# Altium PCB RD15002SCT拼板20160225.PcbDoc (part 2 of 2)
Units mil, origin at the board's own origin, x right, y up, seen from the top; angles counter-clockwise.
Board outline 2710 x 2010 mil, 2 copper layers (Top Layer, Bottom Layer); 365 components, 184 nets, 1158 pads, 288 vias.
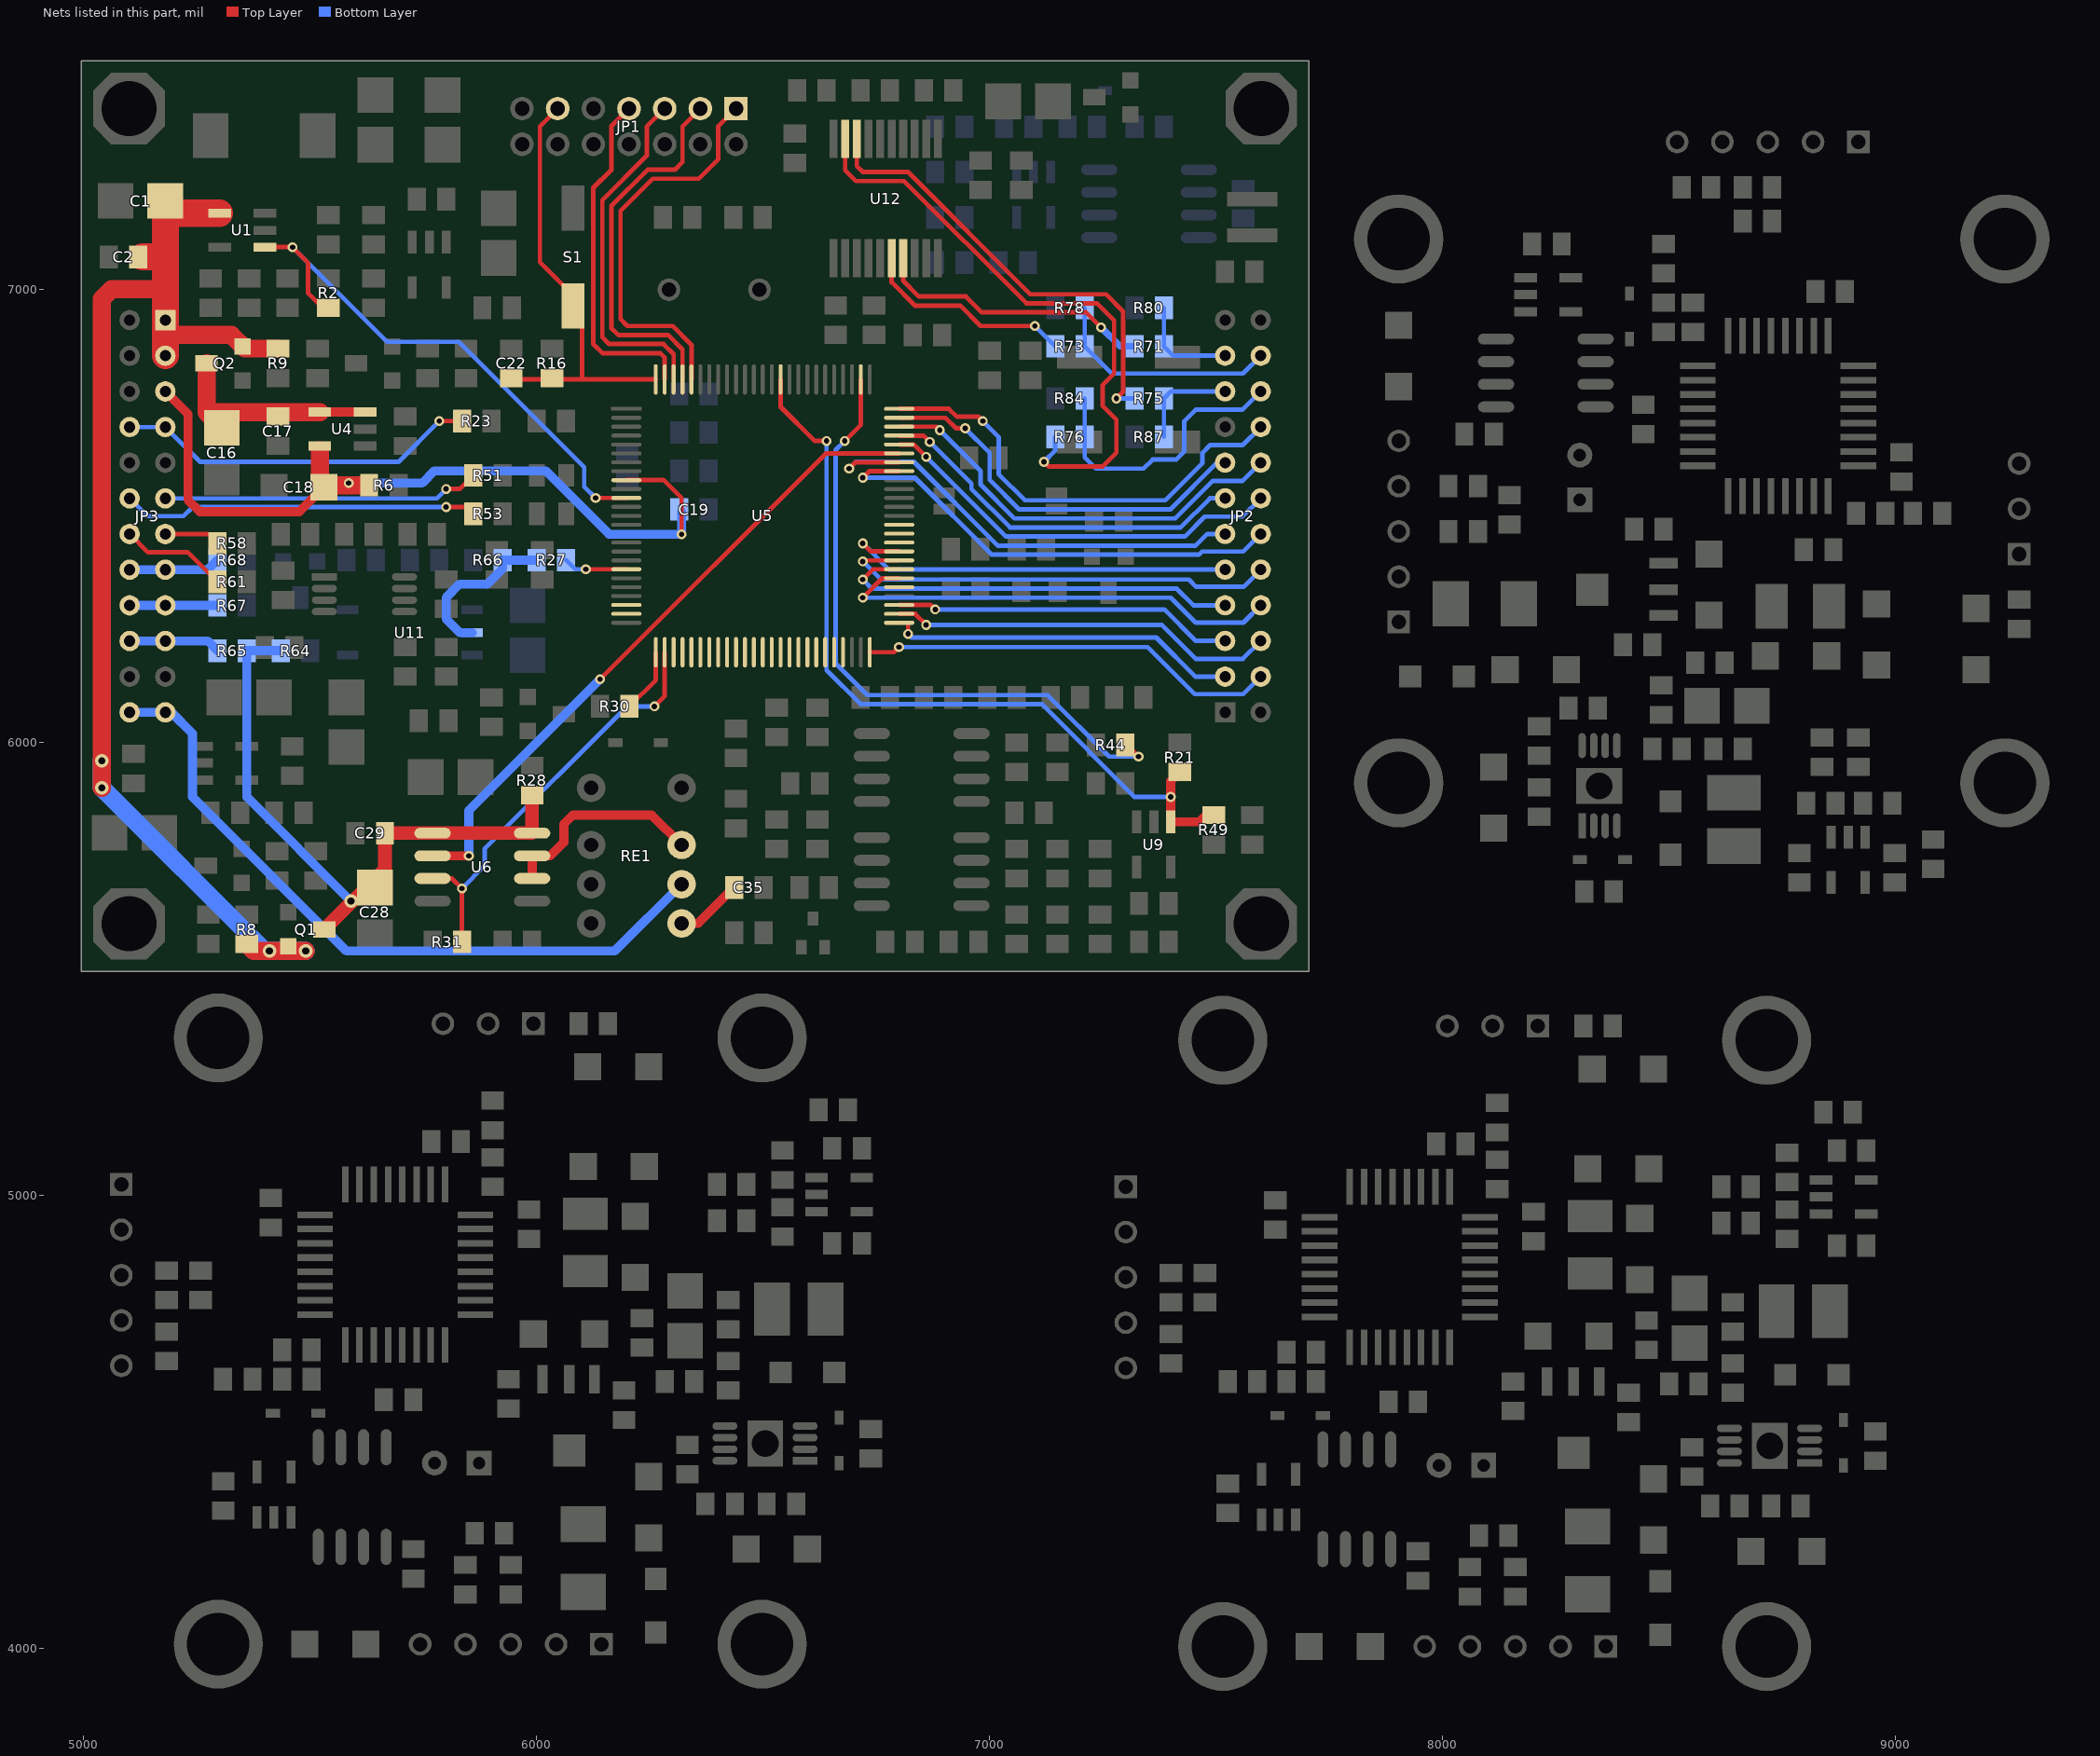
[diagram p2: the nets of this part, all layers, seen from the top]

## Via types
v1: diameter 30, hole 16, Top Layer to Bottom Layer, 220 vias
v2: diameter 22, hole 12, Top Layer to Bottom Layer, 68 vias

## Nets (pads, with @x,y where several pads share a name; then routed paths per layer and width w, separated by ;. In a path a pad name is that pad's centre, name@x,y a point inside that pad or via, vN(x,y) a via of type N, cw(c..) or ccw(c..) an arc to the next point about the centre after c; other vN are vias at no path point) (continued)
P3.0: JP2.18 U5.75 | length 1010.6
  Top Layer w10: U5.75@6800.36,6737 6910,6737 6927,6720 6975,6720 v2(6985,6710)
  Bottom Layer w10: v2(6985,6710) 7020,6675 7020,6593 7078,6535 7388,6535 7470,6617 7470,6640 7487,6657 7558.82,6657 JP2.18@7598.74,6696.92
P3.1: JP2.15 U5.74 | length 881.3
  Top Layer w10: U5.74@6800.36,6717.31 6902.69,6717.31 6926,6694 v2(6946,6694)
  Bottom Layer w10: v2(6946,6694) 7000,6640 7000,6580 7065,6515 7399,6515 7502.18,6618.18 JP2.15@7520,6618.18
P3.2: JP2.16 U5.73 | length 950.9
  Top Layer w10: U5.73@6800.36,6697.63 6882.37,6697.63 v2(6890,6690)
  Bottom Layer w10: v2(6890,6690) 6980,6600 6980,6570 7055,6495 7410,6495 7493,6578 7558.56,6578 JP2.16@7598.74,6618.18
P3.3: JP2.13 U5.72 | length 837.4
  Top Layer w10: U5.72@6800.36,6677.94 6854.06,6677.94 v2(6868,6664)
  Bottom Layer w10: v2(6868,6664) 6960,6572 6960,6560 7045,6475 7422,6475 7486.44,6539.44 JP2.13@7520,6539.44
P3.4: JP2.14 U5.71 | length 917.5
  Top Layer w10: U5.71@6800.36,6658.26 6832.74,6658.26 v2(6860,6631)
  Bottom Layer w10: v2(6860,6631) 7036,6455 7431,6455 7475,6499 7558.3,6499 JP2.14@7598.74,6539.44
P3.6: JP2.11 U5.69 | length 1039.6
  Top Layer w10: v2(6690,6605) 6703.89,6618.89 U5.69@6800.36,6618.89
  Bottom Layer w10: v2(6690,6605) 6705,6620 6833,6620 7018,6435 7455,6435 7480.7,6460.7 JP2.11@7520,6460.7
P3.7: JP2.12 U5.68 | length 1054.3
  Top Layer w10: v2(6720,6585) 6734.2,6599.2 U5.68@6800.36,6599.2
  Bottom Layer w10: v2(6720,6585) 6835,6585 7005,6415 7462,6415 7469,6422 7560.04,6422 JP2.12@7598.74,6460.7
P4.1: JP2.5 U5.53 | length 752.5
  Top Layer w10: U5.53@6800.36,6303.93 6870.07,6303.93 v2(6880,6294)
  Bottom Layer w10: v2(6880,6294) 7386,6294 7455.52,6224.48 JP2.5@7520,6224.48
P4.2: JP2.6 U5.52 | length 855.8
  Top Layer w10: U5.52@6800.36,6284.24 6835.76,6284.24 v2(6860,6260)
  Bottom Layer w10: v2(6860,6260) 7380,6260 7455,6185 7559.26,6185 JP2.6@7598.74,6224.48
P4.3: JP2.3 U5.51 | length 763
  Top Layer w10: v2(6820,6240) U5.51@6820,6264
  Bottom Layer w10: v2(6820,6240) 6828,6232 7368,6232 7454.26,6145.74 JP2.3@7520,6145.74
P4.7: U5.47
P5.0: U5.55
P5.1: JP2.8 U5.56 | length 1015.5
  Top Layer w10: v2(6720,6320) 6762.98,6362.98 U5.56@6800.36,6362.98
  Bottom Layer w10: v2(6720,6320) 7400,6320 7455,6265 7560.52,6265 JP2.8@7598.74,6303.22
P5.2: JP2.7 U5.57 | length 913.3
  Top Layer w10: v2(6720,6360) 6742.67,6382.67 U5.57@6800.36,6382.67
  Bottom Layer w10: v2(6720,6360) 6740,6340 7413,6340 7449.78,6303.22 JP2.7@7520,6303.22
P5.3: JP2.10 U5.58 | length 999
  Top Layer w10: v2(6720,6400) 6722.35,6402.35 U5.58@6800.36,6402.35
  Bottom Layer w10: v2(6720,6400) 6760,6360 7440,6360 7456,6344 7560.78,6344 JP2.10@7598.74,6381.96
P5.4: JP2.9 U5.59 | length 911.8
  Top Layer w10: v2(6720,6440) 6737.96,6422.04 U5.59@6800.36,6422.04
  Bottom Layer w10: v2(6720,6440) 6778.04,6381.96 JP2.9@7520,6381.96
P5.5: U5.60
P5.6: U5.61
P5.7: U5.62
P7.0: U5.46
P7.1: U5.45
P7.2: U5.44
P7.3: U5.43
P7.4: U5.42
P7.5: U5.41
P7.6: U5.40
P7.7: U5.39
P8.0: U5.38
P8.1: U5.37
P8.2: U5.36
P8.3: U5.35
P8.4: U5.34
P8.5: U5.33
P8.6: U5.32
P8.7: U5.31
P9.0: U5.30
P9.1: U5.29
P9.2: U5.28
P9.6: U5.24
P9.7: U5.23
P10.3: R27.1 U5.19 | length 141.4
  Top Layer w10: v2(6108.33,6382.67) U5.19@6198,6382.67
  Bottom Layer w10: R27.1@6065,6403 6085.33,6382.67 v2(6108.33,6382.67)
PCRX/B-: JP2.22 R73.2 R78.2 | length 514.9
  Bottom Layer w10: R78.2@7210,6960 R73.2@7210,6875 7270,6815 7559.34,6815 JP2.22@7598.74,6854.4
PCTX/A+: JP2.21 R71.2 R80.2 | length 228.5
  Bottom Layer w10: R80.2@7385,6960 R71.2@7385,6875 7405.6,6854.4 JP2.21@7520,6854.4
PULSE: R27.2 R66.2 U11.5 | length 362.7
  Bottom Layer w20: U11.5@5857.8,6243 5830,6243 5800,6273 5800,6320 5830,6350 5891,6350 5925,6384 R66.2@5925,6403 R27.2@6000,6403
PULSE2: JP3.15 JP3.16 R68.1 | length 202.5
  Bottom Layer w20: JP3.16@5101.26,6381.82 5273.82,6381.82 R68.1@5295,6403
PWR_CN: R2.1@5540,6960 U1.1@5400,7094 U5.11 | length 1226.4
  Top Layer w10: U1.1@5400,7094 v2(5461,7094) 5495,7060 5495,6993 5528,6960 R2.1@5540,6960 ; v2@6130,6540 v2(6130.15,6540.15) U5.11@6198,6540.15
  Bottom Layer w10: v2(5461,7094) 5670,6885 5828,6885 6105,6608 6105,6565.3 v2(6130.15,6540.15)
RAIN1: JP3.19 JP3.20 R65.2 | length 202.6
  Bottom Layer w20: JP3.20@5101.26,6224.34 5273.66,6224.34 R65.2@5295,6203
RAIN2/PULSE1: JP3.17 JP3.18 R67.1 | length 193.9
  Bottom Layer w10: R67.1@5294.92,6303.08 R67.1@5295,6303
  Bottom Layer w20: JP3.18@5101.26,6303.08 5101.34,6303 R67.1@5295,6303
RED: JP3.23 JP3.24 RE1.6 | length 1580
  Bottom Layer w20: JP3.24@5101.26,6066.86 5193.14,6066.86 5240,6020 5240,5880 5580,5540 6172.6,5540 RE1.6@6320,5687.4
RED_R: C35.2 RE1.5 | length 148.8
  Top Layer w20: RE1.5@6320,5600.79 6356.79,5600.79 C35.2@6436,5680
RED_T: RE1.7 U6.6 U6.7 | length 468
  Top Layer w20: U6.6@5990,5700 U6.7@5990,5750 6030,5750 6060,5780 6060,5820 6080,5840 6254.02,5840 RE1.7@6320,5774.02
RES_SENSOR+: JP3.11 R51.2 | length 701
  Top Layer w10: v2(5800,6560) 5830,6560 R51.2@5860,6590
  Bottom Layer w10: JP3.11@5180,6539.3 5779.3,6539.3 v2(5800,6560)
RES_SENSOR-: JP3.12 R53.2 | length 789.5
  Top Layer w10: v2(5800,6520) 5845,6520 R53.2@5860,6505
  Bottom Layer w10: JP3.12@5101.26,6539.3 5140.56,6500 5220,6500 5240,6520 v2(5800,6520)
RESET: C22.2@5943.98,6805 JP1.11 R16.1@6034,6805 S1.2 U5.100 | length 973.1
  Top Layer w10: C22.2@5943.98,6805 5947.02,6801.96 U5.100@6262.96,6801.96 ; JP1.11@6046.3,7400 6007,7360.7 6007,7061 6080,6988 6080,6939 6100,6919 6100,6801.96
RS232RX0: R73.1 U12.16 | length 472.8
  Top Layer w10: U12.16@6783.64,7069.29 6783.64,7016.36 6835,6965 6935,6965 6980,6920 v2(7100,6920)
  Bottom Layer w10: v2(7100,6920) R73.1@7145,6875
RS232RX1: R76.1 U12.9 | length 1357.2
  Top Layer w10: U12.9@6681.28,7333.07 6681.28,7263.72 6705,7240 6811,7240 7081,6970 7237,6970 7275,6932 7275,6815 7250,6790 7250,6743 7280,6713 7280,6640 7250,6610 7130,6610 v2(7120,6620)
  Bottom Layer w10: v2(7120,6620) 7145,6645 R76.1@7145,6675
RS232TX0: R71.1 U12.17 | length 620.3
  Top Layer w10: U12.17@6809.23,7069.29 6809.23,7019.77 6844,6985 6948,6985 6983,6950 7213,6950 v2(7246,6917)
  Bottom Layer w15: v2(7246,6917) 7288,6875 R71.1@7320,6875
RS232TX1: R75.1 U12.8 | length 1019.3
  Top Layer w10: U12.8@6706.87,7333.07 6706.87,7273.13 6720,7260 6820,7260 7090,6990 7257,6990 7295,6952 7295,6775 v2(7280,6760)
  Bottom Layer w10: v2(7280,6760) R75.1@7320,6760
SENSORRX/B-: JP2.20 R76.2 R84.2 | length 639
  Bottom Layer w10: R84.2@7210,6760 7210,6630 7235,6605 7340,6605 7360,6625 7412,6625 7430,6643 7430,6710 7455,6735 7558.08,6735 JP2.20@7598.74,6775.66
SENSORTX/A+: JP2.19 R75.2 R87.2 | length 226.5
  Bottom Layer w10: R87.2@7385,6675 R75.2@7385,6760 7400.66,6775.66 JP2.19@7520,6775.66
TCK: JP1.7 U5.99 | length 771
  Top Layer w10: JP1.7@6203.78,7400 6165,7361.22 6165,7265 6125,7225 6125,6880 6145,6860 6273,6860 6282.65,6850.35 U5.99@6282.65,6801.96
TDI: JP1.3 U5.97 | length 844
  Top Layer w10: U5.97@6322.02,6801.96 6322.02,6867.98 6290,6900 6180,6900 6165,6915 6165,7185 6245,7265 6305,7265 6322,7282 6322,7360.74 JP1.3@6361.26,7400
TDO: JP1.1 U5.96 | length 886.9
  Top Layer w10: U5.96@6341.7,6801.96 6341.7,6878.3 6300,6920 6200,6920 6185,6935 6185,7174 6256,7245 6358,7245 6401,7288 6401,7361 JP1.1@6440,7400
TMS: JP1.5 U5.98 | length 790.5
  Top Layer w10: JP1.5@6282.52,7400 6243,7360.48 6243,7296 6145,7198 6145,6895 6160,6880 6280,6880 6302.33,6857.67 U5.98@6302.33,6801.96
TRAN_PWR_CN: JP2.4 U5.50 | length 927.2
  Top Layer w10: U5.50@6735.4,6199.6 6788.6,6199.6 v2(6800,6211)
  Bottom Layer w10: v2(6800,6211) 7349,6211 7453,6107 7560,6107 JP2.4@7598.74,6145.74
VBAT: C1.1@5180,7196 C2.2@5120,7071.94 JP3.1 JP3.3 Q1.2 Q2.2 R8.1@5359.99,5555.02 R9.1@5428.99,6870 U1.4@5300,7169 | length 2797.2
  Top Layer w40: v1(5040,5900) 5040,6980 5061,7001 5180,7001 ; 5180,6900 5326,6900 5356,6870 R9.1@5428.99,6870 ; R8.1@5359.99,5555.02 5375.01,5540 v1(5490,5540)
  Top Layer w60: C2.2@5130,7073 5180,7073 ; JP3.3@5180,6854.26 C1.1@5180,7196 ; C1.1@5180,7169 U1.4@5300,7169
  Bottom Layer w40: v1(5040,5960) v1(5040,5900) 5400,5540 v1(5490,5540)
  other v1: 5410,5540
VCOLL: C28.1 C29.2 Q1.3 R28.1 R64.1 R65.1 U6.1@5770,5800 U6.8 | length 1400.8
  Top Layer w30: Q1.3@5531,5587.01 5665,5721.01 C29.2@5665,5800 U6.8@5990,5800 R28.1@5990,5884
  Bottom Layer w20: R64.1@5435,6203 R65.1@5360,6203 5360,5880 v1(5590,5650)
VCORE: C16.1@5305,6695 C17.2@5429.06,6720 Q2.3 U4.3@5621,6730 U4.4@5521,6730 | length 507.1
  Top Layer w20: U4.4@5521,6730 U4.3@5621,6730
  Top Layer w40: C16.1@5271,6730 U4.4@5521,6730 ; Q2.3@5271,6837.99 5271,6729 C16.1@5305,6695
VOL_CUR+: JP3.13 R58.2 | length 123.5
  Top Layer w10: JP3.13@5180,6460.56 5274.44,6460.56 R58.2@5295,6440
VOL_CUR-: JP3.14 R61.2 | length 238.5
  Top Layer w10: JP3.14@5101.26,6460.56 5141.82,6420 5230,6420 R61.2@5295,6355 R61.2@5294,6355
VREF: C18.1@5530,6564 C19.2@6315,6515 JP3.5 R6.1@5630,6568.37 U4.5@5521,6655 U5.9 | length 1846.5
  Top Layer w10: U5.9@6198,6579.52 6280.48,6579.52 6320,6540 v2(6320,6460)
  Top Layer w20: JP3.5@5180,6775.52 5230,6725.52 5230,6536 5256,6510 5476,6510 C18.1@5530,6564
  Top Layer w40: U4.5@5521,6645 5521,6577 5529.63,6568.37 R6.1@5630,6568.37
  Bottom Layer w20: v2(5585,6573) 5747,6573 5774,6600 6020,6600 6160,6460 v2(6320,6460) C19.2@6320,6510
VW_DRIVE: U5.70 U6.2@5770,5750 | length 1457
  Top Layer w10: v2(6140,6140) 6638.57,6638.57 U5.70@6800.36,6638.57
  Top Layer w20: U6.2@5770,5750 v2(5850,5750)
  Bottom Layer w20: v2(5850,5750) 5850,5850 v2(6140,6140)
VW_EN: R31.1 U5.27 U6.3@5770,5700 | length 934.3
  Top Layer w10: U6.3@5770,5700 5813,5700 v2(5835,5678) R31.1@5835,5560 ; v2(6260,6080) 6282.65,6102.65 U5.27@6282.65,6199.6
  Bottom Layer w10: v2(5835,5678) 5885,5728 5885,5765 6200,6080 v2(6260,6080)
VW_RA: R44.2 U5.77 | length 1444.1
  Top Layer w10: v2(6680,6666) 6715.72,6701.72 U5.77@6715.72,6801.96 ; R44.2@7300,5995 7303,5995 v2(7329,5969)
  Bottom Layer w10: v2(6680,6666) 6660,6646 6660,6175 6730,6105 7128,6105 7264,5969 v2(7329,5969)
VW_RD: R21.1 R49.2 U5.86 U9.1 | length 1794.7
  Top Layer w10: U5.86@6538.55,6801.96 6538.55,6741.45 6614,6666 v2(6640,6666)
  Top Layer w20: R21.1@7420,5935 7400,5915 U9.1@7400,5825 7463,5825 7478,5840 R49.2@7495,5840
  Bottom Layer w10: v2(6640,6666) 6640,6160 6715,6085 7115,6085 7320,5880 v2(7400,5880)
VW_TRCN: R30.1 U5.26 | length 143.6
  Top Layer w10: R30.1@6205,6080 6262.96,6137.96 U5.26@6262.96,6199.6
WHITE: JP3.7 JP3.8 R23.2 | length 802.8
  Top Layer w10: v2(5785,6710) R23.2@5835,6710
  Bottom Layer w10: JP3.8@5101.26,6696.78 JP3.7@5180,6696.78 5256.78,6620 5695,6620 v2(5785,6710)
pads on no net: C1.1@5487.73,4009.24 C1.1@7705.73,4004.24 C1.1@7903.24,6921.27 C1.2@5622.73,4009.24 C1.2@7840.73,4004.24 C1.2@7903.24,6786.27 C2.1@5872.73,4409.24 C2.1@8090.73,4404.24 C2.1@8303.24,6536.27 C2.2@5774.31,4409.24 C2.2@7992.31,4404.24 C2.2@8303.24,6634.69 C3.1@6462.73,4219.24 C3.1@8113.24,5946.27 C3.1@8680.73,4214.24 C3.2@6597.73,4219.24 C3.2@8113.24,5811.27 C3.2@8815.73,4214.24 C4.1@6507.73,4319.24 C4.1@8213.24,5901.27 C4.1@8725.73,4314.24 C4.2@6572.73,4319.24 C4.2@8213.24,5836.27 C4.2@8790.73,4314.24 C5.1@6332.73,4384.24 C5.1@8278.24,6076.27 C5.1@8550.73,4379.24 C5.2@6332.73,4449.24 C5.2@8343.24,6076.27 C5.2@8550.73,4444.24 C6.1@6737.73,4484.24 C6.1@8378.24,5671.27 C6.1@8955.73,4479.24 C6.2@6737.73,4419.24 C6.2@8313.24,5671.27 C6.2@8955.73,4414.24 C7.1@6422.73,4704.24 C7.1@8598.24,5986.27 C7.1@8640.73,4699.24 C7.2@6422.73,4769.24 C7.2@8640.73,4764.24 C7.2@8663.24,5986.27 C8.1@6327.73,4789.24 C8.1@8545.73,4784.24 C8.1@8683.24,6081.27 C8.2@6327.73,4679.24 C8.2@8545.73,4674.24 C8.2@8573.24,6081.27 C9.1@6192.73,4569.24 C9.1@8410.73,4564.24 C9.1@8463.24,6216.27 C9.2@6192.73,4504.24 C9.2@8398.24,6216.27 C9.2@8410.73,4499.24 C10.1@5937.73,4529.24 C10.1@8155.73,4524.24 C10.1@8423.24,6471.27 C10.2@5937.73,4594.24 C10.2@8155.73,4589.24 C10.2@8488.24,6471.27 C11.1@6127.73,4694.24 C11.1@8345.73,4689.24 C11.1@8588.24,6281.27 C11.2@5992.73,4694.24 C11.2@8210.73,4689.24 C11.2@8588.24,6416.27 C12.1@5412.73,4994.24 C12.1@7630.73,4989.24 C12.1@8888.24,6996.27 C12.2@5412.73,4929.24 C12.2@7630.73,4924.24 C12.2@8823.24,6996.27 C13.1@6237.73,5064.24 C13.1@8455.73,5059.24 C13.1@8958.24,6171.27 C13.2@6102.73,5064.24 C13.2@8320.73,5059.24 C13.2@8958.24,6306.27 C14.1@6717.73,4894.24 C14.1@8788.24,5691.27 C14.1@8935.73,4889.24 C14.2@6652.73,4894.24 C14.2@8788.24,5756.27 C14.2@8870.73,4889.24 C15.1@6542.73,5034.24 C15.1@8760.73,5029.24 C15.1@8928.24,5866.27 C15.2@6542.73,5099.24 C15.2@8760.73,5094.24 C15.2@8993.24,5866.27 C16.1@6652.73,5104.24 C16.1@8870.73,5099.24 C16.1@8998.24,5756.27 C16.2@6717.73,5104.24 C16.2@8935.73,5099.24 C16.2@8998.24,5691.27 C17.1@6422.73,4634.24 C17.1@8528.24,5986.27 C17.1@8640.73,4629.24 C17.2@6422.73,4569.24 C17.2@8463.24,5986.27 C17.2@8640.73,4564.24 C18.1@5727.73,4154.24 C18.1@7945.73,4149.24 C18.1@8048.24,6681.27 C18.2@5727.73,4219.24 C18.2@7945.73,4214.24 C18.2@8113.24,6681.27 C19.1@5307.73,4304.24 C19.1@7525.73,4299.24 C19.1@8198.24,7101.27 C19.2@5307.73,4369.24 C19.2@7525.73,4364.24 C19.2@8263.24,7101.27 C20.1@5307.73,4594.24 C20.1@7525.73,4589.24 C20.1@8488.24,7101.27 C20.2@5372.73,4594.24 C20.2@7590.73,4589.24 C20.2@8488.24,7036.27 C21.1@6247.73,5284.24 C21.1@8465.73,5279.24 C21.1@9178.24,6161.27 C21.2@6112.73,5284.24 C21.2@8330.73,5279.24 C21.2@9178.24,6296.27 C22.1@6157.73,5379.24 C22.1@8375.73,5374.24 C22.1@9273.24,6251.27 C22.2@6092.73,5379.24 C22.2@8310.73,5374.24 C22.2@9273.24,6316.27 C23.1@5767.73,5119.24 C23.1@7985.73,5114.24 C23.1@9013.24,6641.27 C23.2@5832.73,5119.24 C23.2@8050.73,5114.24 C23.2@9013.24,6576.27 C24.1@5182.73,4834.24 C24.1@7400.73,4829.24 C24.1@8728.24,7226.27 C24.2@5182.73,4769.24 C24.2@7400.73,4764.24 C24.2@8663.24,7226.27 C25.1@5982.73,4904.24 C25.1@8200.73,4899.24 C25.1@8798.24,6426.27 C25.2@5982.73,4969.24 C25.2@8200.73,4964.24 C25.2@8863.24,6426.27 D1.1@6262.73,4035.18 D1.1@7929.18,6146.27 D1.1@8480.73,4030.18 D1.2@6262.73,4153.29 D1.2@8047.29,6146.27 D1.2@8480.73,4148.29 D2.1@6102.73,4124.24 D2.1@8018.24,6306.27 D2.1@8320.73,4119.24 D2.2@6102.73,4274.24 D2.2@8168.24,6306.27 D2.2@8320.73,4269.24 D4.1@6667.73,4509.24 D4.1@8403.24,5741.27 D4.1@8885.73,4504.24 D4.2@6667.73,4409.24 D4.2@8303.24,5741.27 D4.2@8885.73,4404.24 D5.1@5417.73,4519.24 D5.1@7635.73,4514.24 D5.1@8413.24,6991.27 D5.2@5517.73,4519.24 D5.2@7735.73,4514.24 D5.2@8413.24,6891.27 D6.1 D6.2 F1.1 F1.2 J1.1 J1.2 J1.3 J1.4 J1.5 JP1.4 JP1.6 JP1.8 JP1.10 JP1.12 JP1.13 JP1.14 L1.1@6637.73,4749.24 L1.1@8643.24,5771.27 L1.1@8855.73,4744.24 L1.2@6519.62,4749.24 L1.2@8643.24,5889.38 L1.2@8737.62,4744.24 P1.1 P1.2 P1.3 P1.4 P1.5 P2.1 P2.2 P2.3 R1.1@6232.73,4729.24 R1.1@8450.73,4724.24 R1.1@8623.24,6176.27 R1.2@6232.73,4664.24 R1.2@8450.73,4659.24 R1.2@8558.24,6176.27 R2.1@6437.73,4319.24 R2.1@8213.24,5971.27 R2.1@8655.73,4314.24 R2.2@6372.73,4319.24 R2.2@8213.24,6036.27 R2.2@8590.73,4314.24 R3.1@6347.73,4589.24 R3.1@8483.24,6061.27 R3.1@8565.73,4584.24 R3.2@6282.73,4589.24 R3.2@8483.24,6126.27 R3.2@8500.73,4584.24 R4.1@6107.73,4959.24 R4.1@8325.73,4954.24 R4.1@8853.24,6301.27 R4.2@6107.73,4833.25 R4.2@8325.73,4828.25 R4.2@8727.25,6301.27 R5.1@6217.73,4954.24 R5.1@8435.73,4949.24 R5.1@8848.24,6191.27 R5.2@6217.73,4819.24 R5.2@8435.73,4814.24 R5.2@8713.24,6191.27 R6.1@6542.73,4909.24 R6.1@8760.73,4904.24 R6.1@8803.24,5866.27 R6.2@6542.73,4974.24 R6.2@8760.73,4969.24 R6.2@8868.24,5866.27 R7.1@6397.73,5024.24 R7.1@8615.73,5019.24 R7.1@8918.24,6011.27 R7.2@6462.73,5024.24 R7.2@8680.73,5019.24 R7.2@8918.24,5946.27 R8.1@6397.73,4944.24 R8.1@8615.73,4939.24 R8.1@8838.24,6011.27 R8.2@6462.73,4944.24 R8.2@8680.73,4939.24 R8.2@8838.24,5946.27 R9.1@6622.73,5189.24 R9.1@8840.73,5184.24 R9.1@9083.24,5786.27 R9.2@6687.73,5189.24 R9.2@8905.73,5184.24 R9.2@9083.24,5721.27 R10.1@5437.73,4594.24 R10.1@7655.73,4589.24 R10.1@8488.24,6971.27 R10.2@5502.73,4594.24 R10.2@7720.73,4589.24 R10.2@8488.24,6906.27 R11.1@5662.73,4549.24 R11.1@7880.73,4544.24 R11.1@8443.24,6746.27 R11.2@5727.73,4549.24 R11.2@7945.73,4544.24 R11.2@8443.24,6681.27 R12.1@5502.73,4659.24 R12.1@7720.73,4654.24 R12.1@8553.24,6906.27 R12.2@5437.73,4659.24 R12.2@7655.73,4654.24 R12.2@8553.24,6971.27 R13.1@5862.73,4254.24 R13.1@8080.73,4249.24 R13.1@8148.24,6546.27 R13.2@5927.73,4254.24 R13.2@8145.73,4249.24 R13.2@8148.24,6481.27 R14.1@5842.73,4119.24 R14.1@8013.24,6566.27 R14.1@8060.73,4114.24 R14.2@5842.73,4184.24 R14.2@8060.73,4179.24 R14.2@8078.24,6566.27 R15.1@5942.73,4119.24 R15.1@8013.24,6466.27 R15.1@8160.73,4114.24 R15.2@5942.73,4184.24 R15.2@8078.24,6466.27 R15.2@8160.73,4179.24 R16.1@5902.73,5019.24 R16.1@8120.73,5014.24 R16.1@8913.24,6506.27 R16.2@5902.73,5084.24 R16.2@8120.73,5079.24 R16.2@8978.24,6506.27 R17.1@5902.73,5144.24 R17.1@8120.73,5139.24 R17.1@9038.24,6506.27 R17.2@5902.73,5209.24 R17.2@8120.73,5204.24 R17.2@9103.24,6506.27 R18.1@5257.73,4834.24 R18.1@7475.73,4829.24 R18.1@8728.24,7151.27 R18.2@5257.73,4769.24 R18.2@7475.73,4764.24 R18.2@8663.24,7151.27 R19.1@5182.73,4699.24 R19.1@7400.73,4694.24 R19.1@8593.24,7226.27 R19.2@5182.73,4634.24 R19.2@7400.73,4629.24 R19.2@8528.24,7226.27 U1. U1.1@6592.73,4414.24 U1.1@8308.24,5816.27 U1.1@8810.73,4409.24 U1.2@6592.73,4439.83 U1.2@8333.83,5816.27 U1.2@8810.73,4434.83 U1.3@6592.73,4465.42 U1.3@8359.42,5816.27 U1.3@8810.73,4460.42 U1.4@6592.73,4491.01 U1.4@8385.01,5816.27 U1.4@8810.73,4486.01 U1.5@6415.57,4491.01 U1.5@8385.01,5993.43 U1.5@8633.57,4486.01 U1.6 U1.7 U1.8 U2.1@6127.73,4594.24 U2.1@8345.73,4589.24 U2.1@8488.24,6281.27 U2.2@6071.83,4436.76 U2.2@6071.83,4594.24 U2.2@8289.83,4431.76 U2.2@8289.83,4589.24 U2.2@8330.76,6337.17 U2.2@8488.24,6337.17 U2.3@6012.77,4594.24 U2.3@8230.77,4589.24 U2.3@8488.24,6396.23 U3.1@6617.73,5039.24 U3.1@8835.73,5034.24 U3.1@8933.24,5791.27 U3.2@6617.73,5002.24 U3.2@8835.73,4997.24 U3.2@8896.24,5791.27 U3.3@6617.73,4964.24 U3.3@8835.73,4959.24 U3.3@8858.24,5791.27 U3.4@6717.73,4964.24 U3.4@8858.24,5691.27 U3.4@8935.73,4959.24 U3.5@6717.73,5039.24 U3.5@8933.24,5691.27 U3.5@8935.73,5034.24 U4.1@5797.73,5024.24 U4.1@8015.73,5019.24 U4.1@8918.24,6611.27 U4.2@5766.24,5024.24 U4.2@7984.24,5019.24 U4.2@8918.24,6642.76 U4.3@5734.74,5024.24 U4.3@7952.74,5019.24 U4.3@8918.24,6674.26 U4.4@5703.24,5024.24 U4.4@7921.24,5019.24 U4.4@8918.24,6705.76 U4.5@5671.75,5024.24 U4.5@7889.75,5019.24 U4.5@8918.24,6737.25 U4.6 U4.7 U4.8 U4.9 U4.10 U4.11 U4.12 U4.13 U4.14 U4.15 U4.16 U4.17 U4.18 U4.19 U4.20 U4.21 U4.22 U4.23 U4.24 U4.25 U4.26 U4.27 U4.28 U4.29 U4.30 U4.31 U4.32 U5.1@5667.73,4444.24 U5.1@7885.73,4439.24 U5.1@8338.24,6741.27 U5.2@5617.73,4444.24 U5.2@7835.73,4439.24 U5.2@8338.24,6791.27 U5.3@5567.73,4444.24 U5.3@7785.73,4439.24 U5.3@8338.24,6841.27 U5.4@5517.73,4444.24 U5.4@7735.73,4439.24 U5.4@8338.24,6891.27 U5.5@5517.73,4224.24 U5.5@7735.73,4219.24 U5.5@8118.24,6891.27 U5.6@5567.73,4224.24 U5.6@7785.73,4219.24 U5.6@8118.24,6841.27 U5.7@5617.73,4224.24 U5.7@7835.73,4219.24 U5.7@8118.24,6791.27 U5.8@5667.73,4224.24 U5.8@7885.73,4219.24 U5.8@8118.24,6741.27 U5.16 U5.17 U5.20 U5.21 U5.22 U6.1@5382.73,4289.24 U6.1@7600.73,4284.24 U6.1@8183.24,7026.27 U6.2@5419.73,4289.24 U6.2@7637.73,4284.24 U6.2@8183.24,6989.27 U6.3@5457.73,4289.24 U6.3@7675.73,4284.24 U6.3@8183.24,6951.27 U6.4@5457.73,4389.24 U6.4@7675.73,4384.24 U6.4@8283.24,6951.27 U6.5@5382.73,4389.24 U6.5@7600.73,4384.24 U6.5@8283.24,7026.27 U12.11 U14.1
copper on no net: | length 53076.6
  Top Layer w10: 5172.73,4624.24 5212.73,4624.24 5451.31,4862.82 5510.49,4862.82 ; v1(5377.73,4839.24) 5421.31,4882.82 5451.31,4882.82 5462.81,4894.31 5510.49,4894.31 ; 5412.73,4989.24 5437.73,4989.24 5469.66,4957.31 5510.49,4957.31 5752.73,4957.31 5766.24,4970.81 5766.24,4980.73 ; 5424.31,4925.81 5510.49,4925.81 ; 5437.73,4659.24 5437.73,4660.45 ; 5457.73,4389.24 5597.73,4389.24 5617.73,4409.24 5617.73,4444.24 ; 5502.73,4594.24 5517.73,4594.24 ; 5517.73,4444.24 5517.73,4519.24 5517.73,4594.24 ; 5517.73,4644.24 5517.73,4594.24 ; 5577.26,4669.91 5577.26,4603.76 5567.73,4594.24 5517.73,4594.24 ; 5608.76,4669.91 5608.76,4603.21 5662.73,4549.24 5667.73,4544.24 5667.73,4444.24 ; 5703.24,4669.91 5703.24,4573.72 5727.73,4549.24 ; v1(5732.73,4739.24) 5734.74,4737.23 5734.74,4669.91 ; 5767.73,5119.24 5766.24,5117.74 5766.24,5024.24 5766.24,4980.73 ; 5797.73,5024.24 5802.73,5019.24 5902.73,5019.24 ; 5864.82,4925.81 5981.16,4925.81 5996.87,4910.09 ; 6002.73,4969.24 5990.8,4957.31 5864.82,4957.31 5789.66,4957.31 5766.24,4980.73 ; 6282.73,4589.24 6282.73,4569.24 6386.55,4465.42 6415.57,4465.42 ; 6342.73,4449.24 6352.14,4439.83 6415.57,4439.83 ; 6415.57,4414.24 6466.73,4414.24 ; 6415.57,4491.01 6415.57,4562.07 6422.73,4569.24 ; 6504.73,4452.24 6543.5,4491.01 6592.73,4491.01 ; 6587.73,4409.24 6592.73,4414.24 v1(6592.73,4379.24) ; 6632.73,4464.24 6717.73,4464.24 6737.73,4484.24 ; v1(6692.73,4354.24) 6667.73,4379.24 6667.73,4409.24 6727.73,4409.24 6737.73,4419.24 ; 7390.73,4619.24 7430.73,4619.24 7669.31,4857.82 7728.49,4857.82 ; v1(7595.73,4834.24) 7639.31,4877.82 7669.31,4877.82 7680.81,4889.31 7728.49,4889.31 ; 7630.73,4984.24 7655.73,4984.24 7687.66,4952.31 7728.49,4952.31 7970.73,4952.31 7984.24,4965.81 7984.24,4975.73 ; 7642.31,4920.81 7728.49,4920.81 ; 7655.73,4654.24 7655.73,4655.45 ; 7675.73,4384.24 7815.73,4384.24 7835.73,4404.24 7835.73,4439.24 ; 7720.73,4589.24 7735.73,4589.24 ; 7735.73,4439.24 7735.73,4514.24 7735.73,4589.24 ; 7735.73,4639.24 7735.73,4589.24 ; 7795.26,4664.91 7795.26,4598.76 7785.73,4589.24 7735.73,4589.24 ; 7826.76,4664.91 7826.76,4598.21 7880.73,4544.24 7885.73,4539.24 7885.73,4439.24 ; 7921.24,4664.91 7921.24,4568.72 7945.73,4544.24 ; v1(7950.73,4734.24) 7952.74,4732.23 7952.74,4664.91 ; 7985.73,5114.24 7984.24,5112.74 7984.24,5019.24 7984.24,4975.73 ; 8015.73,5019.24 8020.73,5014.24 8120.73,5014.24 ; 8082.82,4920.81 8199.16,4920.81 8214.87,4905.09 ; 8220.73,4964.24 8208.8,4952.31 8082.82,4952.31 8007.66,4952.31 7984.24,4975.73 ; v1(8248.24,5716.27) 8273.24,5741.27 8303.24,5741.27 8303.24,5681.27 8313.24,5671.27 ; v1(8273.24,5816.27) 8308.24,5816.27 8303.24,5821.27 ; 8283.24,6951.27 8283.24,6811.27 8303.24,6791.27 8338.24,6791.27 ; 8308.24,5942.27 8308.24,5993.43 ; 8333.83,5993.43 8333.83,6056.86 8343.24,6066.27 ; 8338.24,6741.27 8438.24,6741.27 8443.24,6746.27 8497.21,6800.24 8563.91,6800.24 ; 8338.24,6891.27 8413.24,6891.27 8488.24,6891.27 ; 8346.24,5904.27 8385.01,5865.5 8385.01,5816.27 ; 8358.24,5776.27 8358.24,5691.27 8378.24,5671.27 ; 8359.42,5993.43 8359.42,6022.45 8463.24,6126.27 8483.24,6126.27 ; 8385.01,5993.43 8456.07,5993.43 8463.24,5986.27 ; 8443.24,6681.27 8467.72,6705.76 8563.91,6705.76 ; 8488.24,6906.27 8488.24,6891.27 ; 8500.73,4584.24 8500.73,4564.24 8604.55,4460.42 8633.57,4460.42 ; 8518.24,7236.27 8518.24,7196.27 8756.82,6957.69 8756.82,6898.51 ; 8538.24,6891.27 8488.24,6891.27 ; 8553.24,6971.27 8554.45,6971.27 ; 8560.73,4444.24 8570.14,4434.83 8633.57,4434.83 ; 8563.91,6674.26 8631.23,6674.26 v1(8633.24,6676.27) ; 8563.91,6831.74 8497.76,6831.74 8488.24,6841.27 8488.24,6891.27 ; 8633.57,4409.24 8684.73,4409.24 ; 8633.57,4486.01 8633.57,4557.07 8640.73,4564.24 ; 8722.73,4447.24 8761.5,4486.01 8810.73,4486.01 ; v1(8733.24,7031.27) 8776.82,6987.69 8776.82,6957.69 8788.32,6946.19 8788.32,6898.51 ; 8804.09,6412.13 8819.81,6427.84 8819.81,6544.18 ; 8805.73,4404.24 8810.73,4409.24 v1(8810.73,4374.24) ; 8819.81,6898.51 8819.81,6984.69 ; 8850.73,4459.24 8935.73,4459.24 8955.73,4479.24 ; 8863.24,6406.27 8851.31,6418.2 8851.31,6544.18 8851.31,6619.34 8874.73,6642.76 ; 8883.24,6996.27 8883.24,6971.27 8851.31,6939.34 8851.31,6898.51 8851.31,6656.27 8864.81,6642.76 8874.73,6642.76 ; v1(8910.73,4349.24) 8885.73,4374.24 8885.73,4404.24 8945.73,4404.24 8955.73,4414.24 ; 8913.24,6506.27 8913.24,6606.27 8918.24,6611.27 ; 9013.24,6641.27 9011.74,6642.76 8918.24,6642.76 8874.73,6642.76
  Top Layer w20: 5170.23,4711.74 5182.73,4699.24 5182.73,4769.24 5257.73,4769.24 ; 5257.73,4834.24 5257.73,4894.24 5127.73,5024.24 5082.73,5024.24 5036.51,4978.02 5036.51,4445.46 5117.73,4364.24 v1(5252.73,4364.24) ; v1(5342.73,4929.24) 5412.73,4929.24 ; 5372.73,4594.24 5437.73,4594.24 5419.73,4576.24 5419.73,4289.24 ; 5382.73,4389.24 5362.73,4369.24 5307.73,4369.24 5257.73,4369.24 v1(5252.73,4364.24) ; 5437.73,4659.24 5283.09,4659.24 5252.73,4628.88 v1(5252.73,4364.24) ; 5457.73,4289.24 5502.73,4289.24 5517.73,4274.24 5517.73,4224.24 5517.73,4169.24 5487.73,4139.24 5487.73,4009.24 ; 5567.73,4224.24 5567.73,4319.24 5587.73,4339.24 5857.73,4339.24 5927.73,4269.24 5927.73,4254.24 5942.73,4239.24 5942.73,4184.24 ; v1(5572.73,4114.24) 5607.73,4114.24 5667.73,4174.24 5667.73,4224.24 5672.73,4219.24 5727.73,4219.24 5727.73,4264.24 v1(5722.73,4264.24) ; 5617.73,4224.24 5617.73,4279.24 5637.73,4299.24 5817.73,4299.24 5862.73,4254.24 5842.73,4234.24 5842.73,4184.24 ; 5982.73,4904.24 5991.02,4904.24 5996.87,4910.09 6037.73,4950.95 6037.73,5209.24 6112.73,5284.24 6207.73,5189.24 6622.73,5189.24 ; 6462.73,4944.24 6462.73,4914.24 6527.73,4849.24 6681.02,4849.24 6706.02,4874.24 6717.73,4874.24 6717.73,4894.24 6717.73,4964.24 ; 6462.73,5024.24 6462.73,5027.52 6534.45,5099.24 6542.73,5099.24 6557.73,5099.24 6617.73,5039.24 ; 6542.73,4909.24 6551.02,4909.24 6606.02,4964.24 6617.73,4964.24 ; 6542.73,5034.24 6542.73,4974.24 6570.73,5002.24 6617.73,5002.24 6654.73,5002.24 ; 6652.73,4894.24 6662.73,4904.24 6662.73,4994.24 6654.73,5002.24 ; 6652.73,5104.24 6662.73,5094.24 6662.73,5010.24 6654.73,5002.24 ; 6667.73,4509.24 6667.73,4539.24 v1(6672.73,4544.24) ; 6687.73,5189.24 6687.73,5142.52 6717.73,5112.52 6717.73,5104.24 6717.73,5039.24 ; 7388.23,4706.74 7400.73,4694.24 7400.73,4764.24 7475.73,4764.24 ; 7475.73,4829.24 7475.73,4889.24 7345.73,5019.24 7300.73,5019.24 7254.51,4973.02 7254.51,4440.46 7335.73,4359.24 v1(7470.73,4359.24) ; v1(7560.73,4924.24) 7630.73,4924.24 ; 7590.73,4589.24 7655.73,4589.24 7637.73,4571.24 7637.73,4284.24 ; 7600.73,4384.24 7580.73,4364.24 7525.73,4364.24 7475.73,4364.24 v1(7470.73,4359.24) ; 7655.73,4654.24 7501.09,4654.24 7470.73,4623.88 v1(7470.73,4359.24) ; 7675.73,4284.24 7720.73,4284.24 7735.73,4269.24 7735.73,4219.24 7735.73,4164.24 7705.73,4134.24 7705.73,4004.24 ; 7785.73,4219.24 7785.73,4314.24 7805.73,4334.24 8075.73,4334.24 8145.73,4264.24 8145.73,4249.24 8160.73,4234.24 8160.73,4179.24 ; v1(7790.73,4109.24) 7825.73,4109.24 7885.73,4169.24 7885.73,4219.24 7890.73,4214.24 7945.73,4214.24 7945.73,4259.24 v1(7940.73,4259.24) ; 7835.73,4219.24 7835.73,4274.24 7855.73,4294.24 8035.73,4294.24 8080.73,4249.24 8060.73,4229.24 8060.73,4179.24 ; 7903.24,6921.27 8033.24,6921.27 8063.24,6891.27 8118.24,6891.27 8168.24,6891.27 8183.24,6906.27 8183.24,6951.27 ; v1(8008.24,6836.27) 8008.24,6801.27 8068.24,6741.27 8118.24,6741.27 8113.24,6736.27 8113.24,6681.27 8158.24,6681.27 v1(8158.24,6686.27) ; 8078.24,6466.27 8133.24,6466.27 8148.24,6481.27 8163.24,6481.27 8233.24,6551.27 8233.24,6821.27 8213.24,6841.27 8118.24,6841.27 ; 8078.24,6566.27 8128.24,6566.27 8148.24,6546.27 8193.24,6591.27 8193.24,6771.27 8173.24,6791.27 8118.24,6791.27 ; 8183.24,6989.27 8470.24,6989.27 8488.24,6971.27 8488.24,7036.27 ; 8200.73,4899.24 8209.02,4899.24 8214.87,4905.09 8255.73,4945.95 8255.73,5204.24 8330.73,5279.24 8425.73,5184.24 8840.73,5184.24 ; 8283.24,7026.27 8263.24,7046.27 8263.24,7101.27 8263.24,7151.27 v1(8258.24,7156.27) ; 8403.24,5741.27 8433.24,5741.27 v1(8438.24,5736.27) ; 8553.24,6971.27 8553.24,7125.91 8522.88,7156.27 v1(8258.24,7156.27) ; 8605.74,7238.77 8593.24,7226.27 8663.24,7226.27 8663.24,7151.27 ; 8680.73,4939.24 8680.73,4909.24 8745.73,4844.24 8899.02,4844.24 8924.02,4869.24 8935.73,4869.24 8935.73,4889.24 8935.73,4959.24 ; 8680.73,5019.24 8680.73,5022.52 8752.45,5094.24 8760.73,5094.24 8775.73,5094.24 8835.73,5034.24 ; 8728.24,7151.27 8788.24,7151.27 8918.24,7281.27 8918.24,7326.27 8872.02,7372.49 8339.46,7372.49 8258.24,7291.27 v1(8258.24,7156.27) ; 8760.73,4904.24 8769.02,4904.24 8824.02,4959.24 8835.73,4959.24 ; 8760.73,5029.24 8760.73,4969.24 8788.73,4997.24 8835.73,4997.24 8872.73,4997.24 ; 8788.24,5756.27 8798.24,5746.27 8888.24,5746.27 8896.24,5754.27 ; 8798.24,6426.27 8798.24,6417.98 8804.09,6412.13 8844.95,6371.27 9103.24,6371.27 9178.24,6296.27 9083.24,6201.27 9083.24,5786.27 ; 8803.24,5866.27 8803.24,5857.98 8858.24,5802.98 8858.24,5791.27 ; 8823.24,6996.27 v1(8823.24,7066.27) ; 8838.24,5946.27 8808.24,5946.27 8743.24,5881.27 8743.24,5727.98 8768.24,5702.98 8768.24,5691.27 8788.24,5691.27 8858.24,5691.27 ; 8870.73,4889.24 8880.73,4899.24 8880.73,4989.24 8872.73,4997.24 ; 8870.73,5099.24 8880.73,5089.24 8880.73,5005.24 8872.73,4997.24 ; 8885.73,4504.24 8885.73,4534.24 v1(8890.73,4539.24) ; 8905.73,5184.24 8905.73,5137.52 8935.73,5107.52 8935.73,5099.24 8935.73,5034.24 ; 8918.24,5946.27 8921.52,5946.27 8993.24,5874.55 8993.24,5866.27 8993.24,5851.27 8933.24,5791.27 ; 8928.24,5866.27 8868.24,5866.27 8896.24,5838.27 8896.24,5791.27 8896.24,5754.27 ; 8933.24,5691.27 8998.24,5691.27 9006.52,5691.27 9036.52,5721.27 9083.24,5721.27 ; 8998.24,5756.27 8988.24,5746.27 8904.24,5746.27 8896.24,5754.27
  Top Layer w30: 5567.73,4444.24 5617.73,4444.24 ; 5767.73,5119.24 5767.73,5354.24 5792.73,5379.24 ; 5832.73,5119.24 5897.73,5119.24 5902.73,5114.24 ; 5892.73,5379.24 5902.73,5369.24 5902.73,5209.24 ; 5902.73,5084.24 5902.73,5114.24 ; 5902.73,5144.24 5902.73,5114.24 ; 6107.73,4959.24 v1(6152.73,4914.24) 6167.73,4899.24 6352.73,4899.24 6397.73,4944.24 6397.73,5024.24 ; 7785.73,4439.24 7835.73,4439.24 ; 7985.73,5114.24 7985.73,5349.24 8010.73,5374.24 ; 8050.73,5114.24 8115.73,5114.24 8120.73,5109.24 ; 8110.73,5374.24 8120.73,5364.24 8120.73,5204.24 ; 8120.73,5079.24 8120.73,5109.24 ; 8120.73,5139.24 8120.73,5109.24 ; 8325.73,4954.24 v1(8370.73,4909.24) 8385.73,4894.24 8570.73,4894.24 8615.73,4939.24 8615.73,5019.24 ; 8338.24,6791.27 8338.24,6841.27 ; 8853.24,6301.27 v1(8808.24,6256.27) 8793.24,6241.27 8793.24,6056.27 8838.24,6011.27 8918.24,6011.27 ; 8978.24,6506.27 9008.24,6506.27 ; 9013.24,6576.27 9013.24,6511.27 9008.24,6506.27 ; 9013.24,6641.27 9248.24,6641.27 9273.24,6616.27 ; 9038.24,6506.27 9008.24,6506.27 ; 9103.24,6506.27 9263.24,6506.27 9273.24,6516.27
  Top Layer w40: 5082.73,4624.24 5172.73,4624.24 5182.73,4634.24 ; 5082.73,4724.24 5157.73,4724.24 5170.23,4711.74 ; 5082.73,4924.24 5092.73,4924.24 5182.73,4834.24 ; 5622.73,4009.24 5742.73,4009.24 ; 5727.73,4549.24 5772.73,4594.24 v1(5777.73,4594.24) 5937.73,4594.24 5997.73,4594.24 5997.73,4689.24 5992.73,4694.24 5992.73,4718.25 6107.73,4833.25 ; 5774.31,4409.24 5774.31,4410.81 5892.73,4529.24 5937.73,4529.24 ; 5842.73,4009.24 5842.73,4119.24 ; 5942.73,4009.24 5942.73,4119.24 ; 5992.73,5379.24 6092.73,5379.24 6092.73,5304.24 6112.73,5284.24 ; 6042.73,4009.24 6042.73,4064.24 6102.73,4124.24 ; 6071.83,4594.24 6071.83,4436.76 6125.25,4436.76 v1(6147.73,4459.24) 6192.73,4504.24 ; 6102.73,4274.24 6142.73,4274.24 6247.73,4379.24 6247.73,4346.66 6316.75,4277.65 6316.75,4190.22 6357.73,4149.24 6572.73,4149.24 6597.73,4174.24 6597.73,4219.24 ; 6102.73,5064.24 6107.73,5059.24 6107.73,4959.24 ; 6142.73,4009.24 6236.79,4009.24 6262.73,4035.18 ; 6192.73,4569.24 6152.73,4569.24 6127.73,4594.24 6127.73,4694.24 6127.73,4711.66 6186.94,4770.88 6186.94,4788.45 6217.73,4819.24 ; 6232.73,4664.24 6232.73,4639.24 6282.73,4589.24 ; 6232.73,4729.24 6238.99,4729.24 6258.36,4748.61 ; 6247.73,4244.24 6262.73,4229.24 6262.73,4153.29 ; v1@6287.1,4748.61 6327.73,4789.24 ; 6342.73,4384.24 6342.73,4349.24 6372.73,4319.24 ; 7300.73,4619.24 7390.73,4619.24 7400.73,4629.24 ; 7300.73,4719.24 7375.73,4719.24 7388.23,4706.74 ; 7300.73,4919.24 7310.73,4919.24 7400.73,4829.24 ; 7840.73,4004.24 7960.73,4004.24 ; 7903.24,6266.27 7903.24,6172.21 7929.18,6146.27 ; 7903.24,6366.27 7958.24,6366.27 8018.24,6306.27 ; 7903.24,6466.27 8013.24,6466.27 ; 7903.24,6566.27 8013.24,6566.27 ; 7903.24,6666.27 7903.24,6786.27 ; 7945.73,4544.24 7990.73,4589.24 v1(7995.73,4589.24) 8155.73,4589.24 8215.73,4589.24 8215.73,4684.24 8210.73,4689.24 8210.73,4713.25 8325.73,4828.25 ; 7992.31,4404.24 7992.31,4405.81 8110.73,4524.24 8155.73,4524.24 ; 8047.29,6146.27 8123.24,6146.27 8138.24,6161.27 ; 8060.73,4004.24 8060.73,4114.24 ; 8113.24,5811.27 8068.24,5811.27 8043.24,5836.27 8043.24,6051.27 8084.22,6092.25 8171.65,6092.25 8240.66,6161.27 8273.24,6161.27 8168.24,6266.27 8168.24,6306.27 ; 8160.73,4004.24 8160.73,4114.24 ; 8210.73,5374.24 8310.73,5374.24 8310.73,5299.24 8330.73,5279.24 ; 8213.24,6036.27 8243.24,6066.27 8278.24,6066.27 ; 8260.73,4004.24 8260.73,4059.24 8320.73,4119.24 ; 8289.83,4589.24 8289.83,4431.76 8343.25,4431.76 v1(8365.73,4454.24) 8410.73,4499.24 ; 8303.24,6634.69 8304.81,6634.69 8423.24,6516.27 8423.24,6471.27 ; 8320.73,4269.24 8360.73,4269.24 8465.73,4374.24 8465.73,4341.66 8534.75,4272.65 8534.75,4185.22 8575.73,4144.24 8790.73,4144.24 8815.73,4169.24 8815.73,4214.24 ; 8320.73,5059.24 8325.73,5054.24 8325.73,4954.24 ; 8360.73,4004.24 8454.79,4004.24 8480.73,4030.18 ; 8398.24,6216.27 v1(8353.24,6261.27) 8330.76,6283.75 8330.76,6337.17 8488.24,6337.17 ; 8410.73,4564.24 8370.73,4564.24 8345.73,4589.24 8345.73,4689.24 8345.73,4706.66 8404.94,4765.88 8404.94,4783.45 8435.73,4814.24 ; 8443.24,6681.27 8488.24,6636.27 v1(8488.24,6631.27) 8488.24,6471.27 8488.24,6411.27 8583.24,6411.27 8588.24,6416.27 8612.25,6416.27 8727.25,6301.27 ; 8450.73,4659.24 8450.73,4634.24 8500.73,4584.24 ; 8450.73,4724.24 8456.99,4724.24 8476.36,4743.61 ; 8463.24,6216.27 8463.24,6256.27 8488.24,6281.27 8588.24,6281.27 8605.66,6281.27 8664.88,6222.06 8682.45,6222.06 8713.24,6191.27 ; 8465.73,4239.24 8480.73,4224.24 8480.73,4148.29 ; 8483.24,6126.27 8533.24,6176.27 8558.24,6176.27 ; v1@8505.1,4743.61 8545.73,4784.24 ; 8518.24,7326.27 8518.24,7236.27 8528.24,7226.27 ; 8560.73,4379.24 8560.73,4344.24 8590.73,4314.24 ; 8605.74,7238.77 8618.24,7251.27 8618.24,7326.27 ; 8623.24,6176.27 8623.24,6170.01 8642.61,6150.64 ; v1@8642.61,6121.9 8683.24,6081.27 ; 8728.24,7226.27 8818.24,7316.27 8818.24,7326.27 ; 8853.24,6301.27 8953.24,6301.27 8958.24,6306.27 ; 9178.24,6296.27 9198.24,6316.27 9273.24,6316.27 9273.24,6416.27
  Top Layer w60: 5872.73,4409.24 5967.73,4409.24 6102.73,4274.24 ; 8090.73,4404.24 8185.73,4404.24 8320.73,4269.24 ; 8168.24,6306.27 8303.24,6441.27 8303.24,6536.27
  Bottom Layer w10: 5082.73,4824.24 5362.73,4824.24 v1(5377.73,4839.24) ; v1(6592.73,4379.24) 6617.73,4354.24 v1(6692.73,4354.24) ; 7300.73,4819.24 7580.73,4819.24 v1(7595.73,4834.24) ; v1(8248.24,5716.27) 8248.24,5791.27 v1(8273.24,5816.27) ; 8718.24,7326.27 8718.24,7046.27 v1(8733.24,7031.27) ; v1(8810.73,4374.24) 8835.73,4349.24 v1(8910.73,4349.24)
  Bottom Layer w20: 5037.73,4839.24 5037.73,4879.24 5082.73,4924.24 ; v1(5252.73,4364.24) 5502.73,4114.24 v1(5572.73,4114.24) ; v1(5342.73,4929.24) 5367.73,4904.24 6142.73,4904.24 v1(6152.73,4914.24) ; v1(5722.73,4264.24) 5722.73,4539.24 v1(5777.73,4594.24) ; v1(6462.73,4769.24) 6462.73,4754.24 v1(6672.73,4544.24) ; 7255.73,4834.24 7255.73,4874.24 7300.73,4919.24 ; v1(7470.73,4359.24) 7720.73,4109.24 v1(7790.73,4109.24) ; v1(7560.73,4924.24) 7585.73,4899.24 8360.73,4899.24 v1(8370.73,4909.24) ; v1(7940.73,4259.24) 7940.73,4534.24 v1(7995.73,4589.24) ; v1(8008.24,6836.27) 8008.24,6906.27 v1(8258.24,7156.27) ; v1(8158.24,6686.27) 8433.24,6686.27 v1(8488.24,6631.27) ; v1(8438.24,5736.27) 8648.24,5946.27 v1(8663.24,5946.27) ; v1(8680.73,4764.24) 8680.73,4749.24 v1(8890.73,4539.24) ; 8733.24,7371.27 8773.24,7371.27 8818.24,7326.27 ; v1(8808.24,6256.27) 8798.24,6266.27 8798.24,7041.27 v1(8823.24,7066.27)
  Bottom Layer w40: v1(6147.73,4459.24) 6277.73,4589.24 v1(6277.73,4749.24) ; v1(8353.24,6261.27) 8483.24,6131.27 v1(8643.24,6131.27) ; v1(8365.73,4454.24) 8495.73,4584.24 v1(8495.73,4744.24)
  other v1: 7775.73,3994.24 5557.73,3999.24 8560.73,4084.24 6342.73,4089.24 8885.73,4129.24 6667.73,4134.24 8315.73,4184.24 6097.73,4189.24 7485.73,4189.24 5267.73,4194.24 7340.73,4224.24 5122.73,4229.24 8925.73,4239.24 6707.73,4244.24 7280.73,4304.24 5062.73,4309.24 8180.73,4309.24 5962.73,4314.24 8345.73,4364.24 6127.73,4369.24 8655.73,4369.24 6437.73,4374.24 7565.73,4479.24 5347.73,4484.24 7370.73,4489.24 5152.73,4494.24 8950.73,4569.24 6732.73,4574.24 8345.73,4629.24 6127.73,4634.24 8705.73,4654.24 6487.73,4659.24 8600.73,4679.24 6382.73,4684.24 8960.73,4704.24 6742.73,4709.24 7605.73,4749.24 7825.73,4749.24 8385.73,4749.24 5387.73,4754.24 5607.73,4754.24 6167.73,4754.24 7960.73,4814.24 5742.73,4819.24 8520.73,4969.24 6302.73,4974.24 8655.73,5094.24 6437.73,5099.24 8555.73,5104.24 6337.73,5109.24 7670.73,5109.24 5452.73,5114.24 7885.73,5154.24 8330.73,5154.24 5667.73,5159.24 6112.73,5159.24 7765.73,5204.24 5547.73,5209.24 8570.73,5234.24 6352.73,5239.24 8060.73,5264.24 5842.73,5269.24 8210.73,5279.24 5992.73,5284.24 7825.73,5349.24 5607.73,5354.24 7715.73,5399.24 8520.73,5399.24 5497.73,5404.24 6302.73,5404.24 7920.73,5409.24 5702.73,5414.24 8603.24,5666.27 8468.24,5676.27 8138.24,5701.27 8028.24,5741.27 8553.24,5921.27 8268.24,5971.27 8993.24,5971.27 8578.24,6026.27 9133.24,6056.27 7983.24,6066.27 9003.24,6071.27 8868.24,6106.27 9298.24,6106.27 8648.24,6241.27 8263.24,6281.27 8528.24,6281.27 9053.24,6296.27 8083.24,6311.27 9178.24,6416.27 8208.24,6446.27 9163.24,6566.27 8713.24,6666.27 9308.24,6706.27 9053.24,6741.27 8648.24,6801.27 9248.24,6801.27 7893.24,6851.27 9103.24,6861.27 9298.24,6911.27 9008.24,6956.27 8648.24,7021.27 8378.24,7061.27 8088.24,7141.27 8388.24,7256.27 8123.24,7286.27 8203.24,7346.27

## Polygon pours and split planes (outlines as drawn)
no net on Top Layer "Top Layer-No Net" (solid, remove dead copper, pour order 14): 7540.73,5453.06 7540.73,4904.24 9001.17,4904.24 9001.17,5165.65 8824,5453.06 7540.73,5453.06
no net on Top Layer "Top Layer-No Net" (solid, remove dead copper, pour order 10): 8824,3894 9001.17,4181.4 9001.17,4864.24 7229.51,4864.24 7229.51,4181.4 7406.68,3894 8824,3894
no net on Top Layer "Top Layer-No Net" (solid, remove dead copper, pour order 14): 5322.73,5458.06 5322.73,4909.24 6783.17,4909.24 6783.17,5170.65 6606,5458.06 5322.73,5458.06
no net on Top Layer "Top Layer-No Net" (solid, remove dead copper, pour order 10): 6606,3899 6783.17,4186.4 6783.17,4869.24 5011.51,4869.24 5011.51,4186.4 5188.68,3899 6606,3899
no net on Top Layer "Top Layer-No Net" (solid, remove dead copper, pour order 14): 9352.06,7086.27 8803.24,7086.27 8803.24,5625.83 9064.65,5625.83 9352.06,5803 9352.06,7086.27
no net on Top Layer "Top Layer-No Net" (solid, remove dead copper, pour order 10): 7793,5803 8080.4,5625.83 8763.24,5625.83 8763.24,7397.49 8080.4,7397.49 7793,7220.32 7793,5803
DGND on Top Layer "Top Layer" (solid, remove dead copper, pour order 2): 5000,5500 7700,5500 7700,7500 5000,7500 5000,5500
no net on Bottom Layer "Top Layer-No Net" (solid, remove dead copper, pour order 16): 9001.17,4904.24 9001.17,5165.65 8824,5453.06 7540.73,5453.06 7540.73,4904.24 9001.17,4904.24
no net on Bottom Layer "Top Layer-No Net" (solid, remove dead copper, pour order 8): 8824,3894 9001.17,4071.17 9001.17,4181.4 9001.17,4864.24 7229.51,4864.24 7229.51,4181.4 7406.68,3894 8824,3894
no net on Bottom Layer "Top Layer-No Net" (solid, remove dead copper, pour order 16): 6783.17,4909.24 6783.17,5170.65 6606,5458.06 5322.73,5458.06 5322.73,4909.24 6783.17,4909.24
no net on Bottom Layer "Top Layer-No Net" (solid, remove dead copper, pour order 8): 6606,3899 6783.17,4076.17 6783.17,4186.4 6783.17,4869.24 5011.51,4869.24 5011.51,4186.4 5188.68,3899 6606,3899
no net on Bottom Layer "Top Layer-No Net" (solid, remove dead copper, pour order 16): 8803.24,5625.83 9064.65,5625.83 9352.06,5803 9352.06,7086.27 8803.24,7086.27 8803.24,5625.83
no net on Bottom Layer "Top Layer-No Net" (solid, remove dead copper, pour order 8): 7793,5803 7970.17,5625.83 8080.4,5625.83 8763.24,5625.83 8763.24,7397.49 8080.4,7397.49 7793,7220.32 7793,5803
DGND on Bottom Layer "Top Layer" (solid, remove dead copper, pour order 4): 5000,5500 7700,5500 7700,7500 5000,7500 5000,5500

## Keep-outs
Keep-Out Layer:
  lines w10: 6781,5170.65 6606,5458.06 5188.68,5458.06 5011.51,5170.65 5011.51,4186.4 5188.68,3899 6606,3899 6783.17,4186.4 6783.17,5170.65 ; 8999,5165.65 8824,5453.06 7406.68,5453.06 7229.51,5165.65 7229.51,4181.4 7406.68,3894 8824,3894 9001.17,4181.4 9001.17,5165.65 ; 9064.65,5625.83 8080.4,5625.83 7793,5803 7793,7220.32 8080.4,7397.49 9064.65,7397.49 9352.06,7220.32 9352.06,5803 9064.65,5628 ; 5000,5500 7700,5500 7700,7500 5000,7500 5000,5500

## Other copper
Top Layer:
  region: 8865.73,4454.24 8865.73,4814.24 8845.73,4814.24 8845.73,4454.24
  region: 8665.73,4604.24 8665.73,4709.24 8540.73,4709.24 8540.73,4604.24
  region: 8705.73,4289.24 8705.73,4419.24 8645.73,4419.24 8645.73,4289.24
  region: 8775.73,4744.24 8775.73,4819.24 8520.73,4819.24 8520.73,4744.24
  region: 8780.73,4609.24 8780.73,4669.24 8615.73,4669.24 8615.73,4609.24
  region: 8755.73,4174.24 8755.73,4659.24 8685.73,4659.24 8685.73,4174.24
  region: 8915.73,4569.24 8915.73,4819.24 8815.73,4819.24 8815.73,4569.24
  region: 8865.73,4454.24 8865.73,4469.24 8790.73,4469.24 8790.73,4454.24
  region: 8850.73,4219.24 8850.73,4344.24 8785.73,4344.24 8785.73,4219.24
  region: 8865.73,4184.24 8865.73,4444.24 8845.73,4444.24 8845.73,4184.24
  region: 8865.73,4426.24 8865.73,4444.24 8790.73,4444.24 8790.73,4426.24
  region: 6647.73,4459.24 6647.73,4819.24 6627.73,4819.24 6627.73,4459.24
  region: 6447.73,4609.24 6447.73,4714.24 6322.73,4714.24 6322.73,4609.24
  region: 6487.73,4294.24 6487.73,4424.24 6427.73,4424.24 6427.73,4294.24
  region: 6557.73,4749.24 6557.73,4824.24 6302.73,4824.24 6302.73,4749.24
  region: 6562.73,4614.24 6562.73,4674.24 6397.73,4674.24 6397.73,4614.24
  region: 6537.73,4179.24 6537.73,4664.24 6467.73,4664.24 6467.73,4179.24
  region: 6697.73,4574.24 6697.73,4824.24 6597.73,4824.24 6597.73,4574.24
  region: 6647.73,4459.24 6647.73,4474.24 6572.73,4474.24 6572.73,4459.24
  region: 6632.73,4224.24 6632.73,4349.24 6567.73,4349.24 6567.73,4224.24
  region: 6647.73,4189.24 6647.73,4449.24 6627.73,4449.24 6627.73,4189.24
  region: 6647.73,4431.24 6647.73,4449.24 6572.73,4449.24 6572.73,4431.24
  rectangle: 8353.24,5761.27 8713.24,5781.27
  rectangle: 8503.24,5961.27 8608.24,6086.27
  rectangle: 8188.24,5921.27 8318.24,5981.27
  rectangle: 8643.24,5851.27 8718.24,6106.27
  rectangle: 8508.24,5846.27 8568.24,6011.27
  rectangle: 8073.24,5871.27 8558.24,5941.27
  rectangle: 8468.24,5711.27 8718.24,5811.27
  rectangle: 8353.24,5761.27 8368.24,5836.27
  rectangle: 8118.24,5776.27 8243.24,5841.27
  rectangle: 8083.24,5761.27 8343.24,5781.27
  rectangle: 8325.24,5761.27 8343.24,5836.27
  rectangle net +3.3VCOLL: 5381,5989 5480,6080
  rectangle net +3.3VCOLL: 5440,6061 5561,6139
  rectangle net NetC3_1: 5275,7025 5325,7100
  rectangle net CORE_PWR_CN: 5640,7080 5734,7120
  rectangle net NetC15_2: 5640,7005 5735,7045
  rectangle net +3.3VCORE: 5825,7000 5943,7059

## Silkscreen, mask and mechanical layers (free items; w line width, h text height)
Top Overlay:
  circle w200: c7305,7160 r95
  rectangle: 7408,6445 7490,6555
  rectangle: 7377,6477 7422,6524
  rectangle: 7389,6520 7412,6535
  rectangle: 7397,6529 7417,6542
  rectangle: 7364,6489 7382,6510
  rectangle: 7388,6466 7412,6481
  rectangle: 7396,6458 7414,6471
  rectangle: 7442,6412 7484,6448
  rectangle: 7462,6393 7485,6416
  rectangle: 7470,6384 7485,6399
  rectangle: 7452,6403 7466,6414
  rectangle: 7420,6436 7444,6448
  rectangle: 7431,6424 7448,6440
  rectangle: 7446,6552 7483,6589
  rectangle: 7462,6589 7483,6602
  rectangle: 7453,6585 7471,6597
  rectangle: 7467,6597 7486,6614
  rectangle: 7421,6552 7446,6566
  rectangle: 7432,6559 7451,6577
  rectangle: 7442,6571 7453,6585
  lines w10: 7360,6500 7485,6625 7485,6375 7360,6500
Bottom Overlay:
  text "PN:RD15002SCT-CORE 20160225" at 5965,6655 h30
  text "VN:RD15002SCT-CORE V1.0.0" at 5965,6600 h30
Mechanical 1:
  lines w10: 5000,5500 7700,5500 7700,7500 5000,7500 5000,5500

## Text inside footprints (layer, text, board x,y; h text height)
BT1: Top Overlay "-" at 7600,7080 h60 r180; Top Overlay "+" at 7600,7305 h60 r180
C2: Top Overlay "+" at 8151.52,4419.24 h30 r180
C2: Top Overlay "+" at 5933.52,4424.24 h30 r180
C2: Top Overlay "+" at 8318.24,6475.48 h30 r90
JP2: Bottom Overlay "1" at 7480.63,5948.89 h60 r270
JP3: Bottom Overlay "1" at 5219.37,7051.11 h60 r90
RE1: Top Overlay "8" at 6270,5890 h30 r90; Top Overlay "1" at 6170,5905 h30 r270